# Altium PCB Auxiliary_Horn.PcbDoc
Units mil, origin at the board's own origin, x right, y up, seen from the top; angles counter-clockwise.
Board outline 1785 x 940 mil, 2 copper layers (Top Layer, Bottom Layer); 10 components, 2 nets, 16 pads, 0 vias.
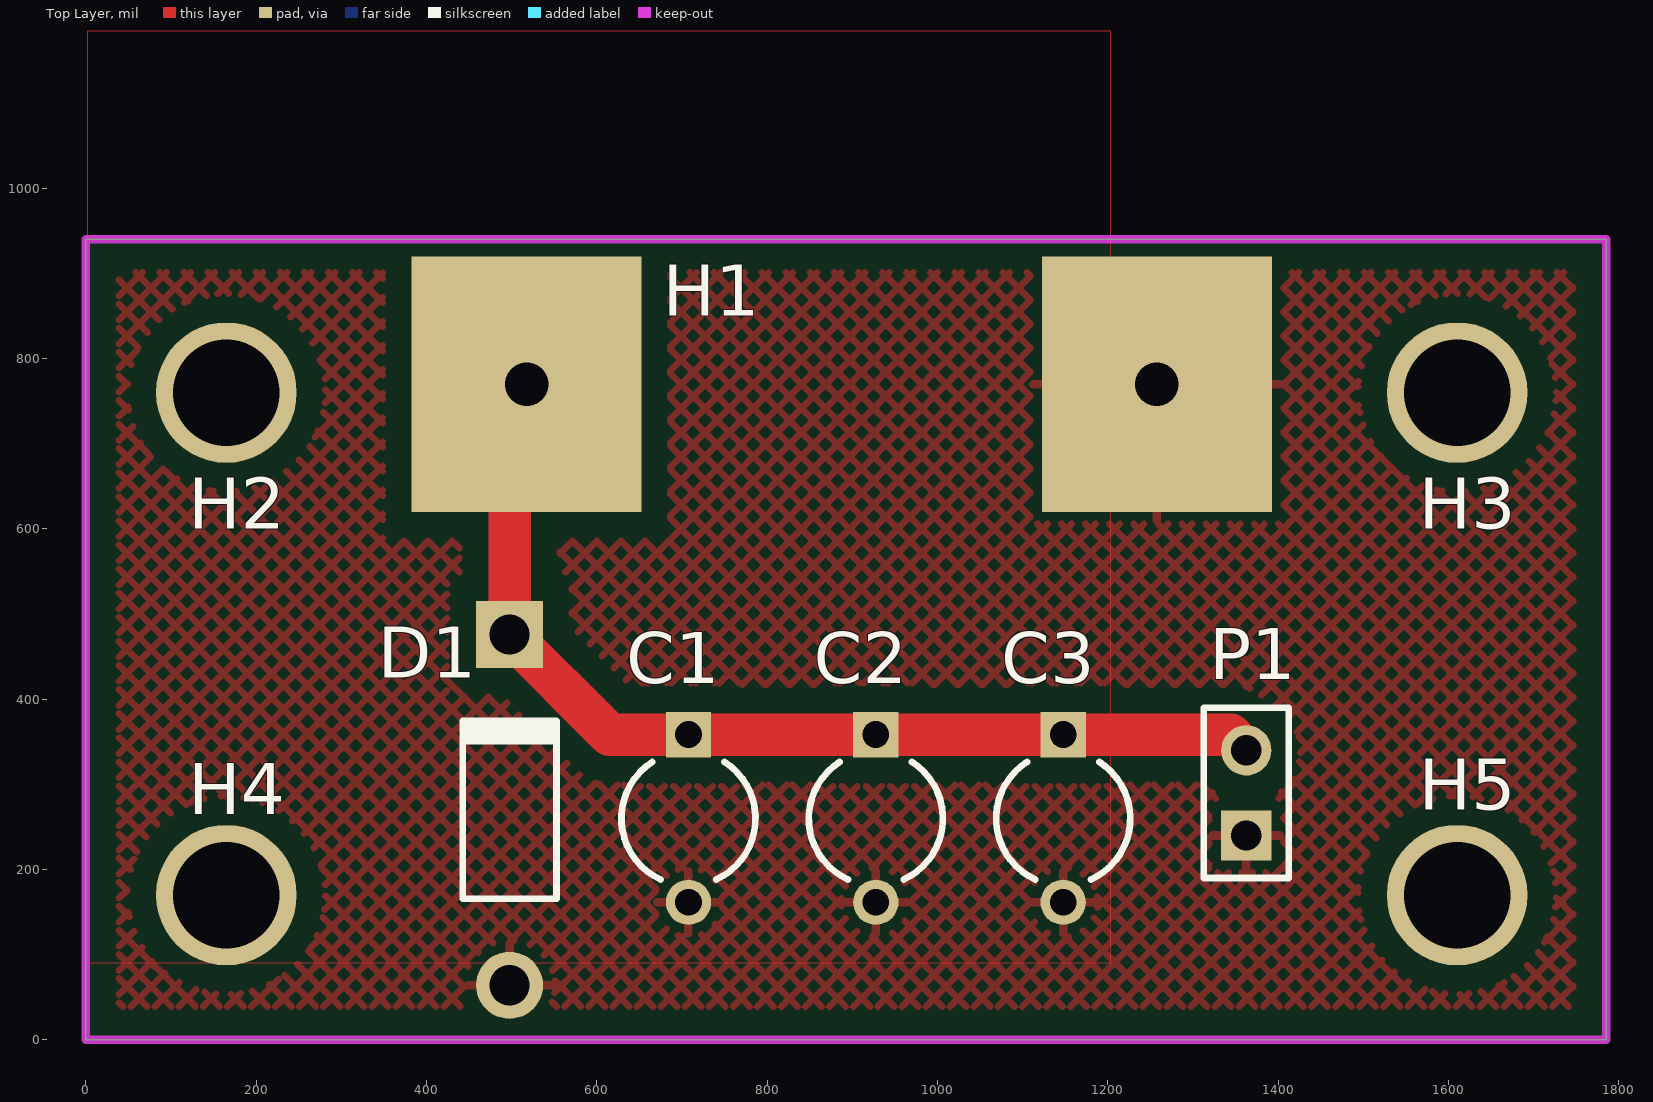
[diagram p0: Top Layer view]
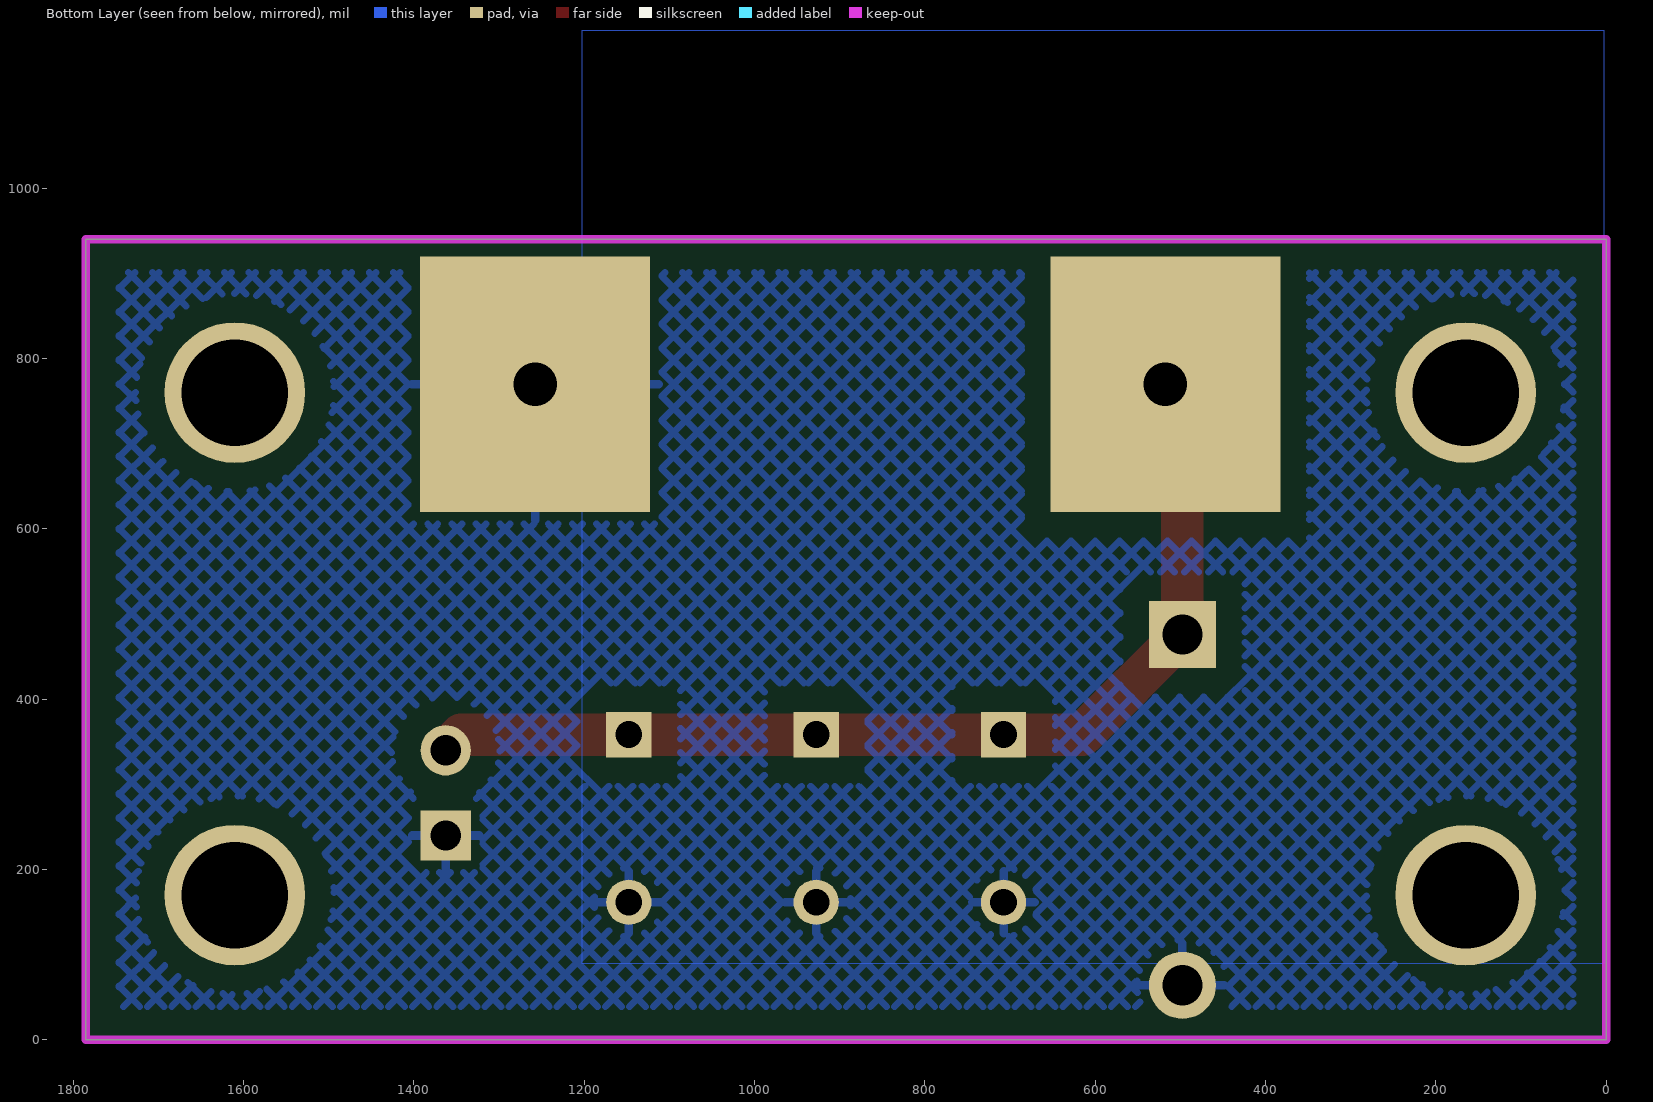
[diagram p1: Bottom Layer view, seen from below]

## Layer stack, top to bottom
Top Solder: solder mask 0.4, Solder Resist, Dk 3.5
Top Layer: signal copper 1.4
Dielectric 1: dielectric 12.6, FR-4, Dk 4.8
Bottom Layer: signal copper 1.4
Bottom Solder: solder mask 0.4, Solder Resist, Dk 3.5

## Board outline
0,0 0,940 1785,940 1785,0

## Design rules (kind name [scope] priority, off if disabled: settings)
Clearance [All] p1: gap=10 ignorepadtopadclearanceinfootprint=FALSE except(0: Arc-Hole Track-Hole SMDPad-Hole THPad-Hole Via-Hole Fill-Hole Poly-Hole Region-Hole Text-Hole; 30: Arc-Fill Arc-Poly Arc-Region Track-Fill Track-Poly Track-Region SMDPad-Fill SMDPad-Poly SMDPad-Region THPad-Fill THPad-Poly THPad-Region Via-Fill Via-Poly Via-Region)
PolygonConnect [All] p1: connectstyle=Relief reliefconductorwidth=10 reliefentries=4 polygonreliefangle="90 Angle" airgapwidth=10
RoutingVias [All] p1: holewidth=28 width=50 viastyle="Through Hole" minholewidth=28 minwidth=50 maxholewidth=28 maxwidth=50
SolderMaskExpansion [All] p1: expansion=4
Width [All] p1: maxlimit=70 minlimit=10 preferedwidth=10
30 further rules are at their usual default settings.

## Components (designator, comment, footprint, x,y, rotation, side; value= is the part's Value field where it differs from the comment)
C1 "Cap1" CAPR5-4X5 707.5,260 r270 top value=?F
C2 "Cap2" CAPR5-4X5 927.5,260 r270 top value=?F
C3 "Cap2" CAPR5-4X5 1147.5,260 r270 top value=?F
D1 "TVS Diode" DO-204AL 497.5,270 r90 top
H1 "Horn" Horn_Pads 382.5,620 r0 top
H2 "Hole 125mil" "Hole 125mil"#1 125,760 r0 top
H3 "Hole 125mil" "Hole 125mil"#2 1610,925 r0 top
H4 "Hole 125mil" "Hole 125mil"#3 165,165 r0 top
H5 "Hole 125mil" "Hole 125mil"#4 1640,145 r0 top
P1 "Header 2" HDR1X2 1362.5,240 r90 top

## Footprints (in the part's own frame and the unit in brackets; to place one, negate y for a bottom-side part, rotate by r counter-clockwise, add the part's x,y. Pads: shape width x height; smd on the part's side, far side on the other; paste and mask are expansions set on the pad)
CAPR5-4X5 [mm] "Capacitor; 2 Leads"
  rect 1.35x1.35 hole 0.8: 1(-2.5,0)
  round 1.35 hole 0.8: 2(2.5,0)
  silkscreen extent -1.69,-2 1.82,2
DO-204AL [mm] "Diode, Axial; Body 5.2 x 2.7 mm (LxDia. max), Lead Dia. 0.86 mm (max)"
  round 2 hole 1.2: 1(-5.23,0)
  rect 2x2 hole 1.2: 2(5.23,0)
  silkscreen extent -2.65,-1.4 2.75,1.4
HDR1X2 [mm] "Connector; Header; 2 Position"
  rect 1.5x1.5 hole 0.9: 1(0,0)
  round 1.5 hole 0.9: 2(2.54,0)
  silkscreen extent -1.27,-1.27 3.81,1.27
"Hole 125mil"#1 [mil]
  round 165 hole 125: 1(40,0)
"Hole 125mil"#2 [mil]
  round 165 hole 125: 1(0,-165)
"Hole 125mil"#3 [mil]
  round 165 hole 125: 1(0,5)
"Hole 125mil"#4 [mil]
  round 165 hole 125: 1(-30,25)
Horn_Pads [mil]
  rect 270x300 hole 51.18: 1(135,150) 2(875,150)

## Part data
C1: library part Cap2, "Capacitor", PackageDescription="Capacitor; 2 Leads", PackageReference=CAPR5-4X5, Published=23-Sep-2002, Publisher="Altium Limited"
C2 C3: "Capacitor", PackageDescription="Capacitor; 2 Leads", PackageReference=CAPR5-4X5, Published=23-Sep-2002, Publisher="Altium Limited"
D1: library part "Diode 11DQ03", "Schottky Rectifier", Code_JEDEC=DO-204-AL, ComponentLink1Description="Manufacturer Link", ComponentLink1URL=http://www.irf.com/, ComponentLink2Description=Datasheet, ComponentLink2URL=http://www.irf.com/product-info/datasheets/data/11dq03.pdf, DatasheetVersion=Dec-1997, LatestRevisionDate=17-Jul-2002, LatestRevisionNote="Re-released for DXP Platform.", PackageDescription="Diode, Axial; Body 5.2 x 2.7 mm (LxDia. max), Lead Dia. 0.86 mm (max)", PackageReference=DO-204AL, Published=8-Jun-2000, Publisher="Altium Limited"
H1: library part hornPads
P1: "Header, 2-Pin", LatestRevisionDate=17-Jul-2002, LatestRevisionNote="Re-released for DXP Platform.", Publisher="Altium Limited"

## Nets (pads, with @x,y where several pads share a name; then routed paths per layer and width w, separated by ;. In a path a pad name is that pad's centre, name@x,y a point inside that pad or via, vN(x,y) a via of type N, cw(c..) or ccw(c..) an arc to the next point about the centre after c; other vN are vias at no path point)
+12: C1.1 C2.1 C3.1 D1.2 H1.1 P1.2 | length 1232
  Top Layer w50: H1.1 497.5,750 497.5,505.91 487.5,495.91 487.5,485.91 D1.2 614.98,358.43 C1.1 C2.1 C3.1 1344.07,358.43 P1.2
GND: C1.2 C2.2 C3.2 D1.1 H1.2 P1.1
pads on no net: H2.1 H3.1 H4.1 H5.1

## Polygon pours and split planes (outlines as drawn)
GND on Top Layer (hatched 45Degree grid 20 track 8, pour order 6): 0,0 1785,0 1785,940 0,940
no net on Top Layer "NONET_L01_P000" (hatched 45Degree grid 20 track 8, shelved, pour order 0): 2.5,90 2.5,1185 1202.5,1185 1202.5,90
GND on Bottom Layer (hatched 45Degree grid 20 track 8, pour order 8): 0,0 1785,0 1785,940 0,940
GND on Bottom Layer "NONET_L02_P001" (hatched 45Degree grid 20 track 8, shelved, pour order 1): 2.5,90 2.5,1185 1202.5,1185 1202.5,90

## Keep-outs
Keep-Out Layer:
  lines w10: 0,0 1785,0 1785,276.25 1785,823.75 1785,940 1222.5,940 407.5,940 0,940 0,0